# Altium PCB beovox-poe.PcbDoc (part 3 of 3)
Units mm, origin at the board's own origin, x right, y up, seen from the top; angles counter-clockwise.
Board outline 92 x 70 mm, 4 copper layers (Top Layer, Layer 2, Layer 3, Bottom Layer), stack 1.576 mm thick; 96 components, 81 nets, 294 pads, 439 vias.
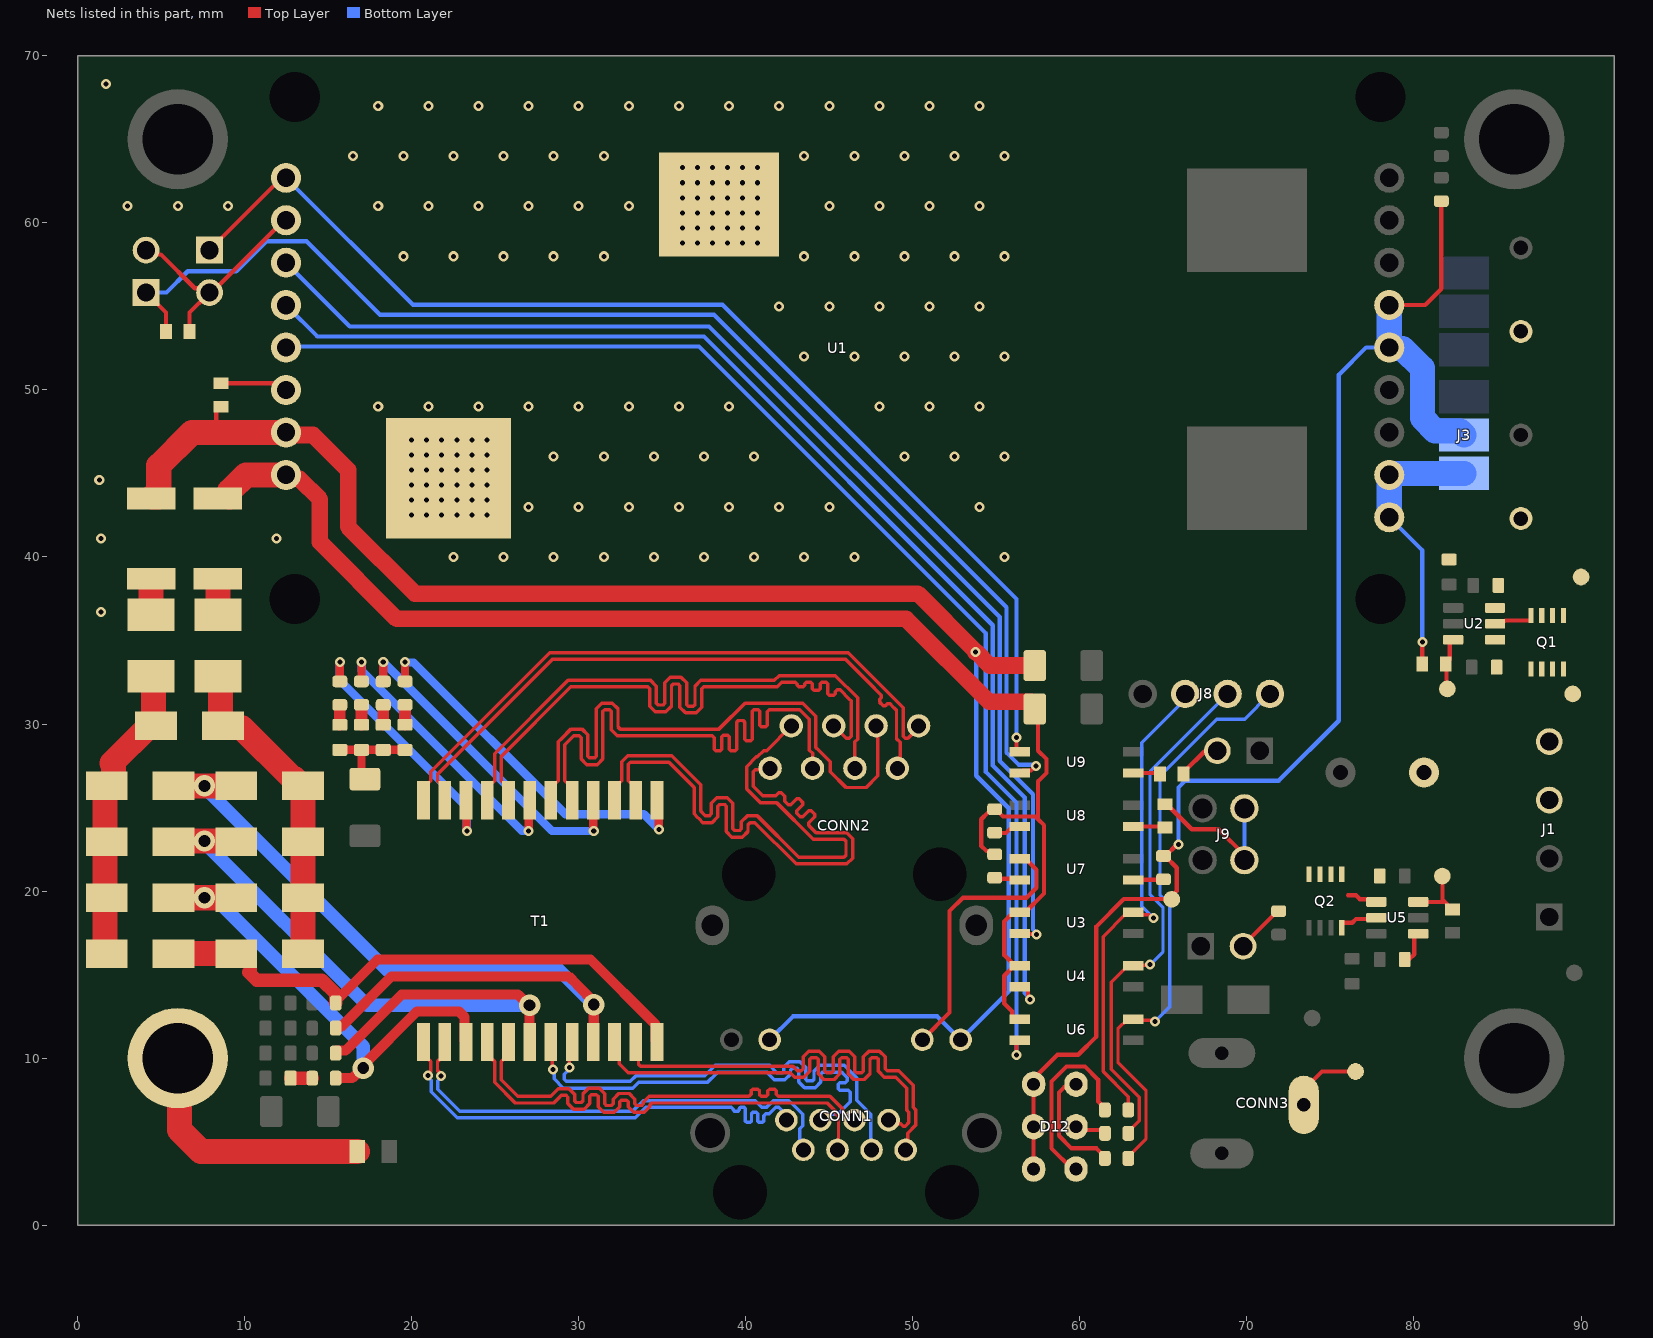
[diagram p4: the nets of this part, all layers, seen from the top]

## Via types
v1: diameter 0.6, hole 0.3, Top Layer to Bottom Layer, tented both sides, 281 vias
v2: diameter 0.61, hole 0.3, Top Layer to Bottom Layer, 144 vias
v3: diameter 1.27, hole 0.711, Top Layer to Bottom Layer, tented both sides, 5 vias
v4: diameter 0.6, hole 0.3, Top Layer to Bottom Layer, 4 vias
v5: diameter 1.27, hole 0.711, Top Layer to Bottom Layer, 3 vias
v6: diameter 1.27, hole 0.711, Top Layer to Bottom Layer, tented top, 2 vias

## Nets (pads, with @x,y where several pads share a name; then routed paths per layer and width w, separated by ;. In a path a pad name is that pad's centre, name@x,y a point inside that pad or via, vN(x,y) a via of type N, cw(c..) or ccw(c..) an arc to the next point about the centre after c; other vN are vias at no path point) (continued)
NetC12_2: C12.2 R13.1 | length 1.3
  Top Layer w0.8: C12.2@12.75,8.8 R13.1@14.05,8.8
NetC13_1: C13.1 C14.1 C15.1 C16.1 C18.2 | length 7.3
  Top Layer w0.5: C18.2@17.2,26.7 17,26.9 C14.1@17,28.45 ; C16.1@19.8,28.4 19.75,28.45 C15.1@18.3,28.45 C14.1@17,28.45 ; C14.1@17,28.45 C13.1@15.7,28.45 15.8,28.45 C14.1@17,28.45
NetC13_2: C13.2 R14.1 | length 1.2
  Top Layer w0.7: C13.2@15.7,29.95 R14.1@15.7,31.15
NetC14_2: C14.2 R15.1 | length 1.2
  Top Layer w0.7: C14.2@17,29.95 R15.1@17,31.15
NetC15_2: C15.2 R16.1 | length 1.2
  Top Layer w0.7: C15.2@18.3,29.95 R16.1@18.3,31.15
NetC16_2: C16.2 R17.1 | length 1.2
  Top Layer w0.7: C16.2@19.6,29.95 R17.1@19.6,31.15
NetC19_1: C19.1 U5.1 | length 1.8
  Top Layer w0.254: C19.1@79.7,15.9 80.012,16.212 80.012,17.287 80.175,17.45 U5.1@80.255,17.45
NetCONN3_3: CONN3.3 TP4.1 | length 3.7
  Top Layer w0.254: CONN3.3@73.5,7.9 73.5,8.2 74.5,9.2 TP4.1@76.5,9.2
NetD1_2: D1.2 D2.1 R12.2 T1.18 | length 43.2
  Top Layer w0.6: R12.2@15.45,10.3 15.45,10.4 15.5,10.45 16.05,10.45 19.4,13.8 26.379,13.8 27.014,13.165 v6(27.065,13.165) ; v6@26.905,13.165 27.065,13.005 T1.18@27.065,10.96
  Top Layer w1.5: D1.2@5.65,22.95 5.7,23 9.45,23 D2.1@9.5,22.95
  Bottom Layer w0.8: v3@7.5,23 17.335,13.165 v6(27.065,13.165)
  other v3: 7.6,23
NetD3_1: D3.1 D4.2 R13.2 T1.15 | length 29.5
  Top Layer w0.6: R13.2@15.45,8.8 16.439,8.8 17.039,9.4 v5(17.1,9.4) 17.1,9.577 20.323,12.8 22.824,12.8 23.175,12.449 23.175,11.04 T1.15@23.255,10.96
  Top Layer w1.5: D4.2@5.65,19.6 D3.1@9.5,19.6
  Bottom Layer w0.8: v3(7.6,19.6) 7.69,19.51 8.29,19.51 17.1,10.7 v5(17.1,9.4)
NetD7_2: D7.2 D8.1 R10.2 T1.24 | length 34.7
  Top Layer w0.6: R10.2@15.45,13.3 15.45,13.4 15.5,13.45 15.675,13.625 17.95,15.9 30.707,15.9 34.605,12.002 34.605,11.04 T1.24@34.685,10.96
  Top Layer w0.8: D8.1@9.456,15.944 10.206,15.944 10.35,15.8 10.35,15.137 ; 10.25,15.137 10.719,14.669 14.631,14.669 15.45,13.85 R10.2@15.45,13.3
  Top Layer w1.5: D7.2@5.65,16.25 5.95,16.25 D8.1@9.5,16.25
NetD9_1: D9.1 D10.2 R11.2 T1.21 | length 52.5
  Top Layer w0.6: R11.2@15.45,11.8 15.5,11.85 15.75,11.85 18.8,14.9 29.4,14.9 29.923,14.377 29.923,14.358 30.9,13.381 30.9,10.985 T1.21@30.875,10.96
  Top Layer w1.5: D10.2@5.65,26.3 D9.1@9.5,26.3
  Bottom Layer w0.8: v3@7.5,26.3 18.5,15.3 28.8,15.3 v6(30.9,13.2)
  other v3: 7.6,26.3
NetD12_2: D12.2 R6.1 | length 6.5
  Top Layer w0.254: D12.2@59.1,8.3 58.75,7.95 58.75,5.35 59.5,4.6 61,4.6 61.5,4.1 R6.1@61.5,4
NetD12_4: D12.4 R8.1 | length 1.9
  Top Layer w0.254: D12.4@59.77,5.9 59.97,5.7 61.3,5.7 R8.1@61.5,5.5
NetD12_6: D12.6 R5.1 | length 11.5
  Top Layer w0.254: D12.6@59.77,3.36 59.54,3.36 58.3,4.6 58.3,8.6 59.2,9.5 60.3,9.5 61.1,8.7 61.1,7.4 61.5,7 R5.1@61.5,6.9
NetFB1_2: FB1.2 R21.1 | length 1.8
  Top Layer w1.5: FB1.2@8.4,36.542 R21.1@8.4,38.3
NetFB2_2: FB2.2 R22.1 | length 1.6
  Top Layer w1.5: FB2.2@4.4,36.542 R22.1@4.4,38.1
NetJ2_2: J2.2 R25.2 | length 2.5
  Top Layer w0.254: R25.2@66.2,27.2 66.3,27.2 67.442,28.342 68.172,28.342 J2.2@68.23,28.4
NetJ5_2: J5.2 R7.2 | length 3
  Top Layer w0.254: J5.2@69.77,16.7 69.77,16.744 71.826,18.8 R7.2@71.9,18.8
NetJ6_1: J6.1 R24.1 U9.4 | length 76.6
  Top Layer w0.254: J6.1@4.102,55.828 5.3,54.63 R24.1@5.3,53.5 ; U9.4@56.409,27.065 56.561,27.217 57.078,27.217 57.361,27.5 v1(57.373,27.5)
  Bottom Layer w0.254: J6.1@4.1,55.83 5.33,55.83 6.6,57.1 9.5,57.1 11.3,58.9 13.7,58.9 18.1,54.5 38.1,54.5 55.614,36.986 55.614,31.421 55.613,31.42 55.613,28.287 56.334,27.566 57.307,27.566 v1(57.373,27.5)
NetMP3_1: MP3.1 R1.1 | length 15.5
  Top Layer w1.5: MP3.1@6,10 6.112,9.888 6.112,5.688 7.4,4.4 R1.1@16.745,4.4
NetQ1_4: Q1.4 U2.5 | length 2.5
  Top Layer w0.254: U2.5@84.855,36 85.018,36.163 85.445,36.163 85.482,36.2 86.975,36.2 87,36.225 Q1.4@87,36.5
NetQ2_4: Q2.4 U5.5 | length 2.5
  Top Layer w0.254: Q2.4@75.675,17.8 75.675,18.075 75.7,18.1 76.3,18.1 76.531,18.331 77.676,18.331 U5.5@77.745,18.4
NetR2_1: R2.1 U1.6 | length 4
  Top Layer w0.254: R2.1@8.6,50.4 11.657,50.4 12.062,49.995 U1.6@12.48,49.995
NetR3_1: R3.1 TP2.1 U2.3 | length 3.8
  Top Layer w0.254: TP2.1@82,32.1 81.95,32.15 81.95,33.45 R3.1@82,33.5 ; U2.3@82.345,35.05 82.208,35.05 82.145,34.987 R3.1@82.145,33.945 ; R3.1@82,33.5 82,33.6 82,33.8 R3.1@82.145,33.945 ; R3.1@82,33.5 R3.1@81.9,33.6 82.145,33.845 R3.1@82.145,33.945
NetR14_2: R14.2 T1.10 | length 15.8
  Top Layer w0.5: R14.2@15.7,32.55 v4(15.7,33.7) ; v1(23.3,23.6) 23.281,23.619 23.281,24.981 T1.10@23.3,25
  Bottom Layer w0.5: v4(15.7,33.7) 15.7,32.6 23.3,25 v1(23.3,23.6)
NetR15_2: R15.2 T1.7 | length 16.7
  Top Layer w0.5: R15.2@17,32.55 v4(17,33.7) ; T1.7@27,24.7 27.019,24.681 v1@27.019,23.619
  Bottom Layer w0.5: v4(17,33.7) 17.019,33.681 17.019,33.181 26.581,23.619 26.981,23.619 v1(27,23.6)
NetR16_2: R16.2 T1.4 | length 19.8
  Top Layer w0.5: R16.2@18.3,32.55 v4(18.3,33.7) ; T1.4@30.875,25.44 30.875,23.625 v1(30.9,23.6)
  Bottom Layer w0.5: v4(18.3,33.7) 28.4,23.6 v1(30.9,23.6)
NetR17_2: R17.2 T1.1 | length 21.7
  Top Layer w0.5: R17.2@19.6,32.55 v4(19.6,33.7) ; v1(34.8,23.7) 34.781,23.719 34.781,24.881 T1.1@34.8,24.9
  Bottom Layer w0.5: v4(19.6,33.7) 19.619,33.681 20.119,33.681 29.2,24.6 33.9,24.6 v1(34.8,23.7)
NetR18_1: R18.1 U7.4 | length 1.9
  Top Layer w0.254: R18.1@54.9,20.8 54.967,20.733 56.172,20.733 U7.4@56.257,20.817 ; U7.4@56.257,20.817 U7.4@56.409,20.665 U7.4@56.257,20.817
NetR19_1: R19.1 U8.4 | length 1.7
  Top Layer w0.254: R19.1@54.9,23.5 54.918,23.482 55.582,23.482 55.813,23.713 56.257,23.713 U8.4@56.409,23.865
NetR23_1: R23.1 TP3.1 U5.3 | length 3.7
  Top Layer w0.254: U5.3@80.255,19.35 81.75,19.35 ; TP3.1@81.7,20.9 81.7,19.5 R23.1@82.3,18.9
NetR25_1: R25.1 U9.1 | length 1.6
  Top Layer w0.254: U9.1@63.3,27 63.365,27.065 64.735,27.065 R25.1@64.8,27
NetR26_1: R26.1 U8.1 | length 1.9
  Top Layer w0.254: U8.1@63.191,23.865 65.035,23.865 R26.1@65.1,23.8
PWR_LED: R4.1 U7.1 | length 2
  Top Layer w0.254: U7.1@63.375,20.665 63.283,20.665 U7.1@63.191,20.665 63.208,20.683 64.982,20.683 R4.1@65,20.7
PWR_LED_ISO: CONN1.10 U7.3 | length 16.5
  Top Layer w0.254: CONN1.10@50.57,11.1 52.2,12.73 52.2,18.8 53,19.6 56.8,19.6 57.4,20.2 57.4,21.274 56.739,21.935 U7.3@56.409,21.935
RPI_3V3: J9.1 R26.2 | length 9.4
  Top Layer w0.254: R26.2@65.1,25.2 65.2,25.2 66.7,23.7 68.3,23.7 69.85,22.15 J9.1@69.85,21.85
  Bottom Layer w0.254: J9.1@69.85,21.85 J9.1@69.85,24.95
SA1: J7.1 U1.1 U9.3 | length 69.7
  Top Layer w0.254: J7.1@7.9,58.37 12.3,62.77 U1.1@12.3,62.8 ; v1(56.2,29.2) 56.2,28.487 56.352,28.335 U9.3@56.409,28.335
  Bottom Layer w0.254: U1.1@12.48,62.695 20.075,55.1 38.6,55.1 56.213,37.487 56.213,29.213 v1(56.2,29.2)
SA2: J6.2 J7.2 R24.2 U1.2 | length 14
  Top Layer w0.254: J6.2@4.1,58.37 4.358,58.112 4.988,58.112 7.012,56.088 7.642,56.088 J7.2@7.9,55.83 ; R24.2@6.7,53.5 6.7,54.63 7.77,55.7 J7.2@8,55.7 ; J7.2@8.1,55.7 J7.2@8.1,55.8 ; J7.2@8.1,55.902 12.353,60.155 U1.2@12.48,60.155
THERM_ISO: U1.18
  other v1: 1.4,36.7 22.5,40 25.5,40 28.5,40 31.5,40 34.5,40 37.5,40 40.5,40 43.5,40 46.5,40 55.5,40 1.4,41.1 11.9,41.1 27,43 30,43 33,43 36,43 39,43 42,43 45,43 54,43 1.3,44.6 28.5,46 31.5,46 34.5,46 37.5,46 40.5,46 49.5,46 52.5,46 55.5,46 18,49 21,49 24,49 27,49 30,49 33,49 36,49 39,49 48,49 51,49 54,49 43.5,52 46.5,52 49.5,52 52.5,52 55.5,52 42,55 45,55 48,55 51,55 54,55 19.5,58 22.5,58 25.5,58 28.5,58 31.5,58 43.5,58 46.5,58 49.5,58 52.5,58 55.5,58 3,61 6,61 9,61 18,61 21,61 24,61 27,61 30,61 33,61 45,61 48,61 51,61 54,61 16.5,64 19.5,64 22.5,64 25.5,64 28.5,64 31.5,64 43.5,64 46.5,64 49.5,64 52.5,64 55.5,64 18,67 21,67 24,67 27,67 30,67 33,67 36,67 39,67 42,67 45,67 48,67 51,67 54,67 1.7,68.3
  other v2: 20,42.5 20.9,42.5 21.8,42.5 22.7,42.5 23.6,42.5 24.5,42.5 20,43.4 20.9,43.4 21.8,43.4 22.7,43.4 23.6,43.4 24.5,43.4 20,44.3 20.9,44.3 21.8,44.3 22.7,44.3 23.6,44.3 24.5,44.3 20,45.2 20.9,45.2 21.8,45.2 22.7,45.2 23.6,45.2 24.5,45.2 20,46.1 20.9,46.1 21.8,46.1 22.7,46.1 23.6,46.1 24.5,46.1 20,47 20.9,47 21.8,47 22.7,47 23.6,47 24.5,47 36.2,58.8 37.1,58.8 38,58.8 38.9,58.8 39.8,58.8 40.7,58.8 36.2,59.7 37.1,59.7 38,59.7 38.9,59.7 39.8,59.7 40.7,59.7 36.2,60.6 37.1,60.6 38,60.6 38.9,60.6 39.8,60.6 40.7,60.6 36.2,61.5 37.1,61.5 38,61.5 38.9,61.5 39.8,61.5 40.7,61.5 36.2,62.4 37.1,62.4 38,62.4 38.9,62.4 39.8,62.4 40.7,62.4 36.2,63.3 37.1,63.3 38,63.3 38.9,63.3 39.8,63.3 40.7,63.3
TxRxA1_N: CONN2.2 T1.3 | length 35.8
  Top Layer w0.206: T1.3@32.145,25.44 32.145,26.205 32.422,26.482 32.461,26.482 32.582,26.603 32.582,27.743 32.935,28.096 35.568,28.096 37.3,26.364 37.3,25.682 37.3,24.792 37.486,24.606 37.596,24.496 37.813,24.496 37.933,24.617 37.933,25.246 38.267,25.579 38.898,25.579 39.231,25.246 39.231,23.729 39.333,23.628 39.636,23.628 39.737,23.729 39.737,24.143 40.09,24.496 40.473,24.496 40.704,24.496 43.179,22.021 45.879,22.021 46,22.141 46,22.979 45.879,23.1 44.04,23.1 41.84,25.3 40.861,25.3 40.05,26.111 40.05,27.45 40.631,28.031 40.693,28.031 41.072,28.41 41.245,28.41 CONN2.2@42.725,29.89
TxRxA1_P: CONN2.1 T1.2 | length 35.3
  Top Layer w0.206: T1.2@33.422,25.778 33.422,26.198 33.138,26.482 33.099,26.482 32.978,26.603 32.978,27.579 33.099,27.7 35.404,27.7 36.904,26.2 36.904,24.628 37.103,24.429 37.206,24.326 37.432,24.1 37.977,24.1 38.329,24.453 38.329,25.082 38.431,25.183 38.734,25.183 38.835,25.082 38.835,23.565 39.169,23.232 39.8,23.232 40.133,23.565 40.133,23.979 40.254,24.1 40.473,24.1 40.54,24.1 43.015,21.625 46.043,21.625 46.396,21.977 46.396,23.143 46.043,23.496 44.206,23.496 44.204,23.496 44.132,23.568 43.774,23.926 43.774,24.096 44.123,24.445 44.123,24.589 43.909,24.803 43.765,24.803 43.403,24.44 43.26,24.44 43.045,24.655 43.045,24.798 43.408,25.161 43.408,25.304 43.193,25.519 43.05,25.519 42.687,25.156 42.544,25.156 42.329,25.371 42.329,25.514 42.341,25.526 42.341,25.669 42.126,25.883 41.983,25.883 41.796,25.696 41.496,25.696 41.025,25.696 40.446,26.275 40.446,27.132 40.567,27.253 41.358,27.253 CONN2.1@41.455,27.35
TxRxA_N: CONN1.2 T1.22 | length 28.8
  Top Layer w0.206: T1.22@32.145,10.96 32.422,10.683 32.422,9.657 32.963,9.116 42.665,9.116 42.93,8.851 43.094,8.851 43.477,8.851 43.829,9.204 43.829,9.925 43.93,10.026 44.234,10.026 44.335,9.925 44.335,9.055 44.668,8.722 45.3,8.722 45.633,9.055 45.633,9.925 45.734,10.026 46.038,10.026 46.139,9.925 46.139,9.055 46.472,8.722 47.104,8.722 47.437,9.055 47.437,9.925 47.538,10.026 47.842,10.026 47.943,9.925 47.943,9.204 48.296,8.851 48.787,8.851 48.983,8.851 49.006,8.828 49.63,8.204 49.63,6.893 49.766,6.757 49.766,6.147 49.549,5.93 49.426,5.93 49.284,6.071 48.769,6.071 CONN1.2@48.55,6.29
TxRxA_P: CONN1.1 T1.23 | length 28.5
  Top Layer w0.206: T1.23@33.415,10.96 33.577,10.798 33.577,9.633 33.698,9.512 42.829,9.512 43.094,9.247 43.313,9.247 43.433,9.368 43.433,10.089 43.766,10.422 44.398,10.422 44.731,10.089 44.731,9.219 44.832,9.118 45.136,9.118 45.237,9.219 45.237,10.089 45.57,10.422 46.202,10.422 46.535,10.089 46.535,9.219 46.636,9.118 46.94,9.118 47.041,9.219 47.041,10.089 47.374,10.422 48.006,10.422 48.339,10.089 48.339,9.368 48.46,9.247 48.787,9.247 49.006,9.247 49.147,9.247 50.026,8.368 50.026,7.057 50.162,6.921 50.162,5.983 49.687,5.508 49.687,4.627 CONN1.1@49.57,4.51
TxRxB1_N: CONN2.6 T1.6 | length 36.4
  Top Layer w0.206: T1.6@28.335,25.44 28.335,26.205 28.612,26.482 28.651,26.482 28.772,26.603 28.772,28.932 29,29.16 29.54,29.7 30.196,29.7 30.549,29.347 30.549,28.069 30.65,27.968 30.954,27.968 31.055,28.069 31.055,30.921 31.388,31.254 32.02,31.254 32.353,30.921 32.353,29.821 32.474,29.7 33.595,29.7 38.4,29.7 39.954,31.254 43.406,31.254 44.2,30.46 44.2,28.596 44.394,28.402 45.05,27.746 45.05,27.15 46,26.2 47.2,26.2 47.905,26.905 CONN2.6@47.905,29.89
TxRxB1_P: CONN2.3 T1.5 | length 36.1
  Top Layer w0.206: T1.5@29.605,25.44 29.605,26.205 29.328,26.482 29.289,26.482 29.168,26.603 29.168,27.381 29.168,28.768 29.704,29.304 30.032,29.304 30.153,29.183 30.153,27.905 30.486,27.572 31.118,27.572 31.451,27.905 31.451,30.757 31.552,30.858 31.856,30.858 31.957,30.757 31.957,29.657 32.31,29.304 33.595,29.304 37.424,29.304 37.983,29.304 38.104,29.183 38.104,28.498 38.195,28.407 38.468,28.407 38.56,28.498 38.56,29.246 38.651,29.338 38.924,29.338 39.016,29.246 39.016,28.498 39.107,28.407 39.38,28.407 39.472,28.498 39.472,30.12 39.563,30.212 39.836,30.212 39.928,30.12 39.928,29.09 40.019,28.999 40.292,28.999 40.384,29.09 40.384,30.767 40.475,30.858 40.748,30.858 40.84,30.767 40.84,29.921 40.931,29.83 41.204,29.83 41.296,29.921 41.296,30.737 41.416,30.858 42.929,30.858 43.242,30.858 43.804,30.296 43.804,28.432 43.998,28.238 43.998,27.447 CONN2.3@44.001,27.444
TxRxB_N: CONN1.6 T1.19 | length 27.4
  Top Layer w0.206: T1.19@28.335,10.96 28.422,10.873 28.422,9.348 v1(28.448,9.322)
  Bottom Layer w0.206: v1(28.448,9.322) 28.523,9.246 28.523,8.765 29.08,8.209 33.246,8.209 33.596,8.558 37.718,8.558 37.791,8.631 38.174,9.014 38.328,9.168 41.259,9.168 41.38,9.047 41.713,8.714 42.345,8.714 42.678,9.047 42.678,9.284 42.779,9.385 43.083,9.385 43.184,9.284 43.184,8.57 43.517,8.237 44.149,8.237 44.482,8.57 44.482,9.047 44.603,9.168 44.822,9.168 45.73,9.168 45.813,9.085 46.081,8.817 46.081,8.646 45.96,8.526 45.632,8.526 45.541,8.434 45.541,8.161 45.632,8.07 46.124,8.07 46.245,7.949 46.245,7.6 46.245,7.38 45.501,6.636 44.816,6.636 CONN1.6@44.47,6.29
TxRxB_P: CONN1.3 T1.20 | length 27.5
  Top Layer w0.206: v1(29.439,9.449) 29.439,10.794 T1.20@29.605,10.96
  Bottom Layer w0.206: v1(29.439,9.449) 29.439,9.342 29.123,9.026 29.123,8.726 29.244,8.605 33.082,8.605 33.432,8.954 37.554,8.954 37.791,9.191 37.894,9.294 38.164,9.564 41.423,9.564 41.776,9.211 41.877,9.11 42.181,9.11 42.282,9.211 42.282,9.448 42.615,9.781 43.247,9.781 43.58,9.448 43.58,8.734 43.681,8.633 43.985,8.633 44.086,8.734 44.086,9.211 44.439,9.564 44.822,9.564 45.894,9.564 46.641,8.817 46.641,7.475 47.472,6.643 47.472,4.568 CONN1.3@47.53,4.51
TxRxC1_N: CONN2.5 T1.9 | length 36.9
  Top Layer w0.206: T1.9@24.525,25.44 24.525,26.205 24.802,26.482 24.841,26.482 24.962,26.603 24.962,28.222 29.358,32.618 33.103,32.618 34.299,32.618 34.652,32.265 34.652,31.24 34.753,31.139 35.057,31.139 35.158,31.24 35.158,32.459 35.491,32.792 36.123,32.792 36.456,32.459 36.456,31.165 36.557,31.064 36.861,31.064 36.962,31.165 36.962,32.265 37.315,32.618 37.698,32.618 41.715,32.618 41.993,32.896 45.364,32.896 46.7,31.56 46.7,29.099 46.535,28.934 CONN2.5@46.535,27.35
TxRxC1_P: CONN2.4 T1.8 | length 36.7
  Top Layer w0.206: T1.8@25.795,25.44 25.795,26.205 25.518,26.482 25.479,26.482 25.358,26.603 25.358,28.058 29.522,32.222 33.103,32.222 34.135,32.222 34.256,32.101 34.256,31.076 34.589,30.743 35.221,30.743 35.554,31.076 35.554,32.295 35.655,32.396 35.959,32.396 36.06,32.295 36.06,31.001 36.393,30.668 37.025,30.668 37.358,31.001 37.358,32.101 37.479,32.222 37.698,32.222 41.879,32.222 42.157,32.5 42.4,32.5 42.959,32.5 43.08,32.379 43.08,32.313 43.171,32.222 43.444,32.222 43.536,32.313 43.536,32.409 43.627,32.5 43.9,32.5 43.992,32.409 43.992,32.116 44.083,32.025 44.356,32.025 44.448,32.116 44.448,32.409 44.539,32.5 44.812,32.5 44.904,32.409 44.904,31.803 44.995,31.712 45.268,31.712 45.36,31.803 45.36,31.928 45.48,32.049 45.651,32.049 46.207,31.493 46.304,31.396 46.304,29.263 46.183,29.142 46.013,29.142 CONN2.4@45.265,29.89
TxRxC_N: CONN1.5 T1.16 | length 29.5
  Top Layer w0.206: T1.16@24.525,10.96 24.525,10.195 24.802,9.918 24.841,9.918 24.962,9.797 24.962,8.549 26.197,7.314 27.487,7.314 28.496,7.314 28.848,7.666 28.95,7.768 29.253,7.768 29.354,7.666 29.354,7.282 29.688,6.949 30.319,6.949 30.652,7.282 30.652,7.712 30.754,7.814 31.057,7.814 31.158,7.712 31.158,7.102 31.492,6.768 32.123,6.768 32.456,7.102 32.456,7.386 32.558,7.487 32.861,7.487 32.962,7.386 32.962,7.102 33.296,6.768 33.927,6.768 34.26,7.102 34.26,7.193 34.381,7.314 34.6,7.314 44.879,7.314 45.4,6.792 45.4,6.633 45.55,6.484 45.55,4.57 CONN1.5@45.49,4.51
TxRxC_P: CONN1.4 T1.17 | length 29.3
  Top Layer w0.206: T1.17@25.795,10.96 25.795,10.195 25.518,9.918 25.479,9.918 25.358,9.797 25.358,8.713 26.361,7.71 27.487,7.71 28.332,7.71 28.452,7.83 28.786,8.164 29.417,8.164 29.75,7.83 29.75,7.446 29.852,7.345 30.155,7.345 30.256,7.446 30.256,7.876 30.59,8.21 31.221,8.21 31.554,7.876 31.554,7.266 31.656,7.164 31.959,7.164 32.06,7.266 32.06,7.55 32.394,7.883 33.025,7.883 33.358,7.55 33.358,7.266 33.46,7.164 33.763,7.164 33.864,7.266 33.864,7.357 34.217,7.71 34.6,7.71 40.092,7.71 40.195,7.71 40.315,7.83 40.315,8.047 40.417,8.148 40.72,8.148 40.821,8.047 40.821,7.811 40.923,7.71 41.226,7.71 41.327,7.811 41.327,8.047 41.429,8.148 41.732,8.148 41.833,8.047 41.833,7.83 41.954,7.71 44.407,7.71 45.043,7.71 45.796,6.956 45.796,6.797 46.304,6.29 CONN1.4@46.51,6.29
TxRxD1_N: CONN2.8 T1.12 | length 37.6
  Top Layer w0.206: T1.12@20.715,25.44 20.715,26.205 20.992,26.482 21.031,26.482 21.152,26.603 21.152,27.152 28.26,34.26 46.14,34.26 47.957,32.443 49.418,30.982 49.418,29.882 49.418,29.275 49.539,29.155 49.71,29.155 CONN2.8@50.445,29.89
TxRxD1_P: CONN2.7 T1.11 | length 37.4
  Top Layer w0.206: T1.11@21.985,25.44 21.985,26.205 21.708,26.482 21.669,26.482 21.548,26.603 21.548,26.988 28.424,33.864 45.976,33.864 47.677,32.163 47.75,32.09 48.108,31.732 48.108,31.561 48.008,31.461 48.008,31.318 48.222,31.103 48.365,31.103 48.466,31.203 48.637,31.203 48.81,31.03 48.883,30.957 49.022,30.818 49.022,30.046 49.022,29.111 49.237,28.897 49.237,27.412 CONN2.7@49.175,27.35
TxRxD_N: CONN1.8 T1.13 | length 28.6
  Top Layer w0.206: T1.13@20.715,10.96 20.715,10.195 20.992,9.918 21.031,9.918 21.152,9.797 21.152,9.194 20.989,9.031 v1(20.989,8.956)
  Bottom Layer w0.206: v1(20.989,8.956) 20.989,8.849 21.164,8.674 21.164,7.976 22.721,6.419 33.385,6.419 34.022,7.056 38.2,7.056 39.126,7.056 39.246,6.935 39.246,6.901 39.32,6.828 39.539,6.828 39.612,6.901 39.612,6.983 39.686,7.056 39.905,7.056 39.978,6.983 39.978,6.232 40.052,6.159 40.271,6.159 40.344,6.232 40.344,6.679 40.418,6.752 40.637,6.752 40.71,6.679 40.71,6.232 40.784,6.159 41.003,6.159 41.076,6.232 41.076,6.538 41.197,6.659 41.3,6.659 41.407,6.659 41.803,7.055 41.974,7.055 42.43,6.599 CONN1.8@42.43,6.29
TxRxD_P: CONN1.7 T1.14 | length 28.8
  Top Layer w0.206: v1(21.758,8.941) 21.758,9.047 21.548,9.258 21.548,9.797 21.669,9.918 21.708,9.918 21.985,10.195 T1.14@21.985,10.96
  Bottom Layer w0.206: v1(21.758,8.941) 21.758,8.834 21.56,8.636 21.56,8.14 22.885,6.815 33.221,6.815 33.858,7.452 38.31,7.452 40.568,7.452 40.965,7.055 41.243,7.055 41.639,7.451 42.585,7.451 42.808,7.228 42.819,7.228 43.4,6.647 43.4,5.944 43.231,5.775 43.231,4.729 CONN1.7@43.45,4.51
Type2: J8.3 R5.2 U3.4 | length 29.2
  Top Layer w0.2: R5.2@62.9,6.9 62.9,7.7 61.4,9.2 61.4,17.274 62.726,18.6 U3.4@63.191,18.6 ; U3.4@63.4,18.7 63.517,18.583 64.124,18.583 64.306,18.4 v1(64.4,18.4)
  Bottom Layer w0.2: v1(64.4,18.4) 63.7,19.1 63.7,28.87 66.3,31.47 J8.3@66.3,31.8
Type2-Det: U1.3 U3.2 | length 72.4
  Top Layer w0.254: U3.2@56.409,17.465 56.442,17.433 57.368,17.433 v1(57.4,17.4)
  Bottom Layer w0.254: U1.3@12.48,57.615 16.295,53.8 37.8,53.8 55.2,36.4 55.2,31.593 55.199,31.592 55.199,27.801 57.2,25.8 57.2,17.694 57.4,17.494 v1(57.4,17.4)
Type3: J8.2 R8.2 U4.4 | length 31.6
  Top Layer w0.2: R8.2@62.9,5.4 62.9,5.6 63.551,6.251 63.551,7.649 61.874,9.326 61.874,14.549 62.893,15.567 64.168,15.567 v1(64.2,15.6)
  Bottom Layer w0.2: v1(64.2,15.6) 64.979,16.379 64.979,18.993 64.2,19.773 64.2,27.16 J8.2@68.84,31.8
Type3-Det: U1.4 U4.2 | length 74.8
  Top Layer w0.254: U4.2@56.409,14.265 56.739,14.265 56.892,14.113 56.892,13.702 57,13.594 v1(57,13.5)
  Bottom Layer w0.254: U1.4@12.48,55.075 12.525,55.075 12.525,55.03 14.355,53.2 37.5,53.2 54.786,35.914 54.786,31.764 54.785,31.763 54.785,27.515 56.7,25.6 56.7,13.894 57,13.594 v1(57,13.5)
Type4: J8.1 R6.2 U6.4 | length 35.3
  Top Layer w0.2: R6.2@62.9,4 62.9,4.1 63.957,5.157 63.957,8.08 62.281,9.757 62.281,11.755 62.861,12.335 U6.4@63.191,12.335 63.26,12.266 64.434,12.266 v1(64.5,12.2)
  Bottom Layer w0.2: v1(64.5,12.2) 65.386,13.086 65.386,19.161 64.8,19.747 64.8,26.9 68.185,30.285 69.865,30.285 J8.1@71.38,31.8
Type4-Det: U1.5 U6.2 | length 75.7
  Top Layer w0.254: v1(56.2,10.2) 56.2,10.913 56.243,10.956 56.3,10.956 U6.2@56.409,11.065
  Bottom Layer w0.254: U1.5@12.8,52.6 37.2,52.6 54.372,35.428 54.372,31.936 54.371,31.935 54.371,27.129 56.2,25.3 v1(56.2,10.2)
VIN2+: C7.1 R18.2 R19.2 R21.2 U1.8 U3.1 U4.1 U6.1 | length 83.4
  Top Layer w0.254: R18.2@54.9,22.2 54.707,22.393 54.407,22.393 54.1,22.7 54.1,24.3 54.507,24.707 54.781,24.707 54.974,24.9 55.403,24.471 57.329,24.471 57.5,24.3 ; U4.1@56.1,15.4 55.944,15.4 55.473,14.929 55.473,13.272 55.949,12.795 55.949,12.487 56.102,12.335 U6.1@56.409,12.335 ; U3.1@56.2,18.8 56.1,18.8 55.473,18.173 55.473,16.164 55.926,15.71 55.926,15.687 56.079,15.535 U4.1@56.409,15.535 ; U3.1@56.704,18.7 57.854,19.85 57.854,23.946 57.5,24.3 ; C7.1@57.3,30.9 57.5,30.7 57.5,28.4 58,27.9 58,27.069 57.5,26.569 57.5,24.3
  Top Layer w1: U1.8@13.29,44.67 14.5,43.461 14.5,40.9 19.1,36.3 49.6,36.3 54.575,31.325 57.125,31.325 57.3,31.15 C7.1@57.3,30.9
  Top Layer w1.5: R21.2@9.1,43.6 9.1,43.936 10.079,44.915 U1.8@12.399,44.915
VIN2-: C8.1 CONN1.9 CONN1.11 R2.2 R22.2 U1.7 | length 102.5
  Top Layer w0.254: 8.3,47.455 R2.2@8.3,48.845
  Top Layer w1: U1.7@12.48,47.455 12.633,47.302 14.098,47.302 16.2,45.2 16.2,41.8 20.2,37.8 50.3,37.8 53.745,34.355 v1(53.745,34.3) ; v1@53.772,34.327 53.8,34.3 54.6,33.5 C8.1@57.3,33.5
  Top Layer w1.5: R22.2@4.5,43.6 4.862,43.6 4.862,45.462 6.855,47.455 8.3,47.455 U1.7@12.48,47.455
  Bottom Layer w0.254: CONN1.11@41.43,11.1 42.83,12.5 51.46,12.5 CONN1.9@52.86,11.1 55.746,13.986 55.746,24.954 53.8,26.9 53.8,34.245 v1(53.745,34.3)
VIN+: D2.2 D3.2 D6.2 D8.2 D9.2 FB1.1 | length 19.4
  Top Layer w1.5: FB1.1@8.4,32.858 8.4,32.798 8.498,32.7 8.55,32.648 8.55,30 8.65,29.9 D6.2@8.7,29.9 8.8,29.8 9.825,29.8 D9.2@12.9,26.725 ; D9.2@13,26.725 13,26.4 13.1,26.3 D9.2@13.425,26.3 ; D8.2@13.5,16.25 D3.2@13.5,19.6 D2.2@13.5,22.95 ; D9.2@13.5,26.3 13.5,23.05 D2.2@13.55,23
VIN-: D1.1 D4.1 D6.1 D7.1 D10.1 FB2.1 | length 19
  Top Layer w1: FB2.1@4.4,32.858 FB2.1@4.845,32.858
  Top Layer w1.5: D7.1@1.65,16.25 D4.1@1.65,19.6 ; D4.1@1.75,19.6 1.65,19.7 1.65,26.3 2.05,26.3 2.15,26.4 2.15,27.65 ; 2.05,27.65 4.3,29.9 D6.1@4.7,29.9 4.65,29.9 4.55,30 4.55,32.708 FB2.1@4.4,32.858
VOUT: C1.P C4.2 C20.2 J1.3 J1.4 Q1.5 Q1.6 Q1.7 Q1.8 Q2.5 Q2.6 Q2.7 Q2.8 TP6.1 U2.4 U5.4 | length 1.9
  Top Layer w0.254: 76.05,19.75 76.522,19.75 76.759,19.513 77.582,19.513 U5.4@77.745,19.35
VOUT1: C6.P D12.1 D12.3 D12.5 J3.2 R4.2 R9.1 TP11.1 U1.13 U1.14 | length 85.1
  Top Layer w0.254: D12.5@57.23,3.36 D12.3@57.23,5.9 D12.1@57.23,8.44 57.23,8.769 58.661,10.2 59.9,10.2 60.986,11.286 60.986,17.886 62.629,19.529 65.327,19.529 65.8,20.002 65.8,21.4 R4.2@65.1,22.1 ; R4.2@65,22.1 R4.2@65.1,22.1 ; TP11.1@65.355,19.5 TP11.1@65.5,19.5 ; v1(65.9,22.8) 65.826,22.8 65.126,22.1 R4.2@65.1,22.1 ; U1.14@78.4,54.5 78.4,54.955 U1.14@78.52,55.075 80.675,55.075 81.633,56.033 R9.1@81.633,61.3
  Bottom Layer w0.254: v1(65.9,22.8) 65.9,26.2 66.3,26.6 71.9,26.6 75.5,30.2 75.5,50.9 77.135,52.535 U1.13@78.52,52.535
  Bottom Layer w1.5: U1.14@78.52,54.535 U1.13@78.52,52.535 78.577,52.478 79.322,52.478 80.5,51.3 80.5,48.313 81.263,47.55 82.75,47.55 J3.2@83,47.3
VOUT2: C2.2 C5.P C21.2 J3.1 Q1.1 Q1.2 Q1.3 R3.2 TP1.1 U1.9 U1.10 U2.6 | length 16.2
  Top Layer w0.254: R3.2@80.5,33.6 v1(80.5,34.9)
  Bottom Layer w0.254: U1.9@78.597,41.88 79.015,41.88 80.5,40.395 v1(80.5,34.9)
  Bottom Layer w1.5: U1.9@78.52,42.375 U1.10@78.52,44.915 U1.10@78.577,44.972 ; U1.10@78.7,45 J3.1@83,45
pads on no net: CONN1.Hole CONN2. J4.3 MP1.1 MP2.1 MP4.1 U1.HOLE

## Polygon pours and split planes (outlines as drawn)
DC+ on Top Layer "DC+_L01_P002" (solid, remove dead copper, pour order 2): 65.9,9.2 66.6,8.5 70.5,8.5 72.183,10.183 72.183,13.983 73.6,15.4 78.515,15.4 78.515,18.3 72.5,18.3 68.2,14 68.2,11.8 66.6,11.8 65.9,11.1
GND on Top Layer "GND_L01_P019" (solid, remove dead copper, pour order 19): 92,70 92,0 60,0 60,70
THERM_ISO on Top Layer "THERM_ISO_L01_P020" (solid, remove dead copper, pour order 20): 56.5,70 0,70 0,35.8 56.5,35.8
VOUT on Top Layer "NONET_L04_P-001" (solid, remove dead copper, pour order 0): 90.1,35.8 84.6,35.8 84.6,31.6 84.2,31.2 81.7,31.2 73.1,22.6 73.1,18.6 78.5,18.6 78.5,22.4 80.1,24 89.2,24 90.1,24.9
0V2 on Top Layer "0V2_L01_P010" (solid, pour order 10): 77,46.2 77,51.03 88,51.03 88,46.2
VOUT1 on Top Layer "VOUT1_L01_P009" (solid, pour order 9): 77,56.2 77,51.5 88,51.5 88,56.2
VOUT2 on Top Layer "VOUT2_L01_P005" (solid, remove dead copper, pour order 5): 77,45.9 77,40.7 81,40.7 84.3,37.4 84.3,36 90.1,36 90.1,41.6 85.8,45.9
THERM_ISO on Layer 2 "THERM_ISO_L02_P013" (solid, remove dead copper, pour order 13): 56.5,70 0,70 0,35.357 56.5,35.357
GND on Layer 2 "GND_L02_P006" (solid, remove dead copper, pour order 6): 92,81 92,0 60,0 60,81
CGND on Layer 2 "S" (solid, remove dead copper, pour order 1): 0,34.7 0,0 55.9,0 55.9,34.7
THERM_ISO on Layer 3 "THERM_ISO_L03_P015" (solid, remove dead copper, pour order 15): 56.3,70 0,70 0,22.8 56.3,22.8
CGND on Layer 3 "CGND_L03_P017" (solid, remove dead copper, pour order 17): 16.5,0 55.5,0 55.5,12.2 16.5,12.2
GND on Layer 3 "GND_L03_P008" (solid, remove dead copper, pour order 8): 92,70 92,0 60,0 60,70
GND on Bottom Layer "s" (solid, remove dead copper, pour order 18): 92,70 92,0 60,0 60,70
THERM_ISO on Bottom Layer "THERM_ISO_L04_P011" (solid, remove dead copper, pour order 11): 56.5,70 0,70 0,0 56.5,0
0V2 on Bottom Layer "0V2_L04_P007" (solid, pour order 7): 81.6,48.8 81.6,53.3 85,53.3 88,50.3 88,46.1 85,46.1 85,48.8

## Keep-outs
Layer 2:
  rectangle: 18.8,12 36.6,24.4
Layer 3:
  rectangle: 18.8,12.1 36.6,24.3
Bottom Layer:
  rectangle: 18.8,12.1 36.6,24.3

## Other copper
Top Layer:
  rectangle net GND: 64.7,56 74.8,64.4
  rectangle net GND: 65.4,40.3 75.5,48.7
Bottom Layer:
  pour cut-out: 16.5,0 16.5,13.6 54.61,13.6 54.61,0

## Silkscreen, mask and mechanical layers (free items; w line width, h text height)
Top Overlay:
  lines w0.15: 83.6,18.5 83.6,18.1 84,18.1 ; 83.6,21.7 83.6,22.1 84,22.1 ; 83.6,27.9 83.6,27.5 ; 84,25.7 83.6,25.7 83.6,27.5 ; 84,27.5 83.6,27.5
  lines w0.2: 72.27,29.225 75,32.5
  lines w0.8: 55.9,0.55 55.9,8.9 59,12 59,70
  text "VOUT ADJUST" at 80.8,68.6 h1.3
  text "PD Signature" at 2.525,53.448 h1.4 r90
  text "None: / Standard" at 0.9,50.9 h1.3
  text "J7: 12.5k  / Phihong" at 0.9,48.2 h1.3
  text "J6+J7: 15k INVALID" at 0.9,46 h1.3
  text "VOUT2" at 85.8,38.1 h1.2
  text "GND" at 62.6,33.4 h1.1
  text "Type2" at 64.9,33.4 h1
  text "Type3" at 67.8,33.4 h1
  text "Type4" at 70.7,33.4 h1
  text "Auto PD-Disable" at 74.5,32.293 h1.1
  text "VOUT" at 85.7,31.4 h1.2
  text "VOUT" at 84.084,27.946 h1.4 r90
  text "DATA" at 37.6,26.4 h1.8 r90
  text "LINK" at 66.7,19.852 h1.1
  text "3V3" at 69.3,19.842 h1.1
  text "GND" at 84.083,18.652 h1.5 r90
  text "DC+ LED" at 66.5,18.5 h1.2
  text "+" at 69.6,18.004 h1.1
  text "-" at 67,17.904 h1.1
  text "VOUT1" at 64.8,17 h1 r90
  text "GND" at 88.4,13.4 h1.2
  text "DC+" at 74.7,12.3 h1.2
  text "BARREL DETECT" at 75.2,10 h1.2
  text ".Revision" at 28.9,3.5 h2
  text ".Title" at 16.9,1.1 h2.6
  text "DATA & POWER" at 36.3,0.7 h1.8 r90
  text "HiFiBerry recommends 12-24VDC / (20VDC Ideal)" at 75,0.5 h1.8
Bottom Overlay:
  drawing of 216 lines, arcs and shapes, not listed
  text "VOUT ADJUST / Open:                12V, 24V / 91k to VOUT1:  10.5V, 21V / 8.2k to 0V1:       15V, 30.2V" at 75.6,63 h1.5
  text "12V" at 88.3,51.4 h1.8
  text "12V: solder both 12V jumpers / 24V: solder 24V jumper" at 76.8,49.5 h1.6
  text "24V" at 88.3,48.4 h1.8
  text "12V" at 88.4,45.1 h1.8
  text "Type 1 ~13W - No LED / Type 2 ~25W - Bottom LED / Type 3 ~50W - Middle LED / Type 4 ~85W - Top LED" at 55.7,10.1 h1.8 r270
Board Outline:
  the board outline again, w0.2
Fab Notes:
  rectangle: 0,-3.5 92,0

## Dimensions
92,70 to 0,70 on Fab Notes
92,0 to 92,70 on Fab Notes

## Text inside footprints (layer, text, board x,y; h text height)
C1: Top Overlay "+" at 83.1,24.61 h1.2 r180
C5: Top Overlay "+" at 91.51,41 h1.2 r90
C6: Top Overlay "+" at 90.61,51.4 h1.2 r90
CONN1: Top Overlay "Y" at 39.14,11.1 h1.2; Top Overlay "G" at 50.57,11.1 h1.2
U3: Top 3D Body "*" at 57.565,18.202 h1.2
U4: Top 3D Body "*" at 57.565,15.002 h1.2
U6: Top 3D Body "*" at 57.565,11.802 h1.2
U7: Top 3D Body "*" at 62.035,21.198 h1.2 r180
U8: Top 3D Body "*" at 62.035,24.398 h1.2 r180
U9: Top 3D Body "*" at 62.035,27.598 h1.2 r180